# EAGLE board zero_board (EAGLE 9.5.2)
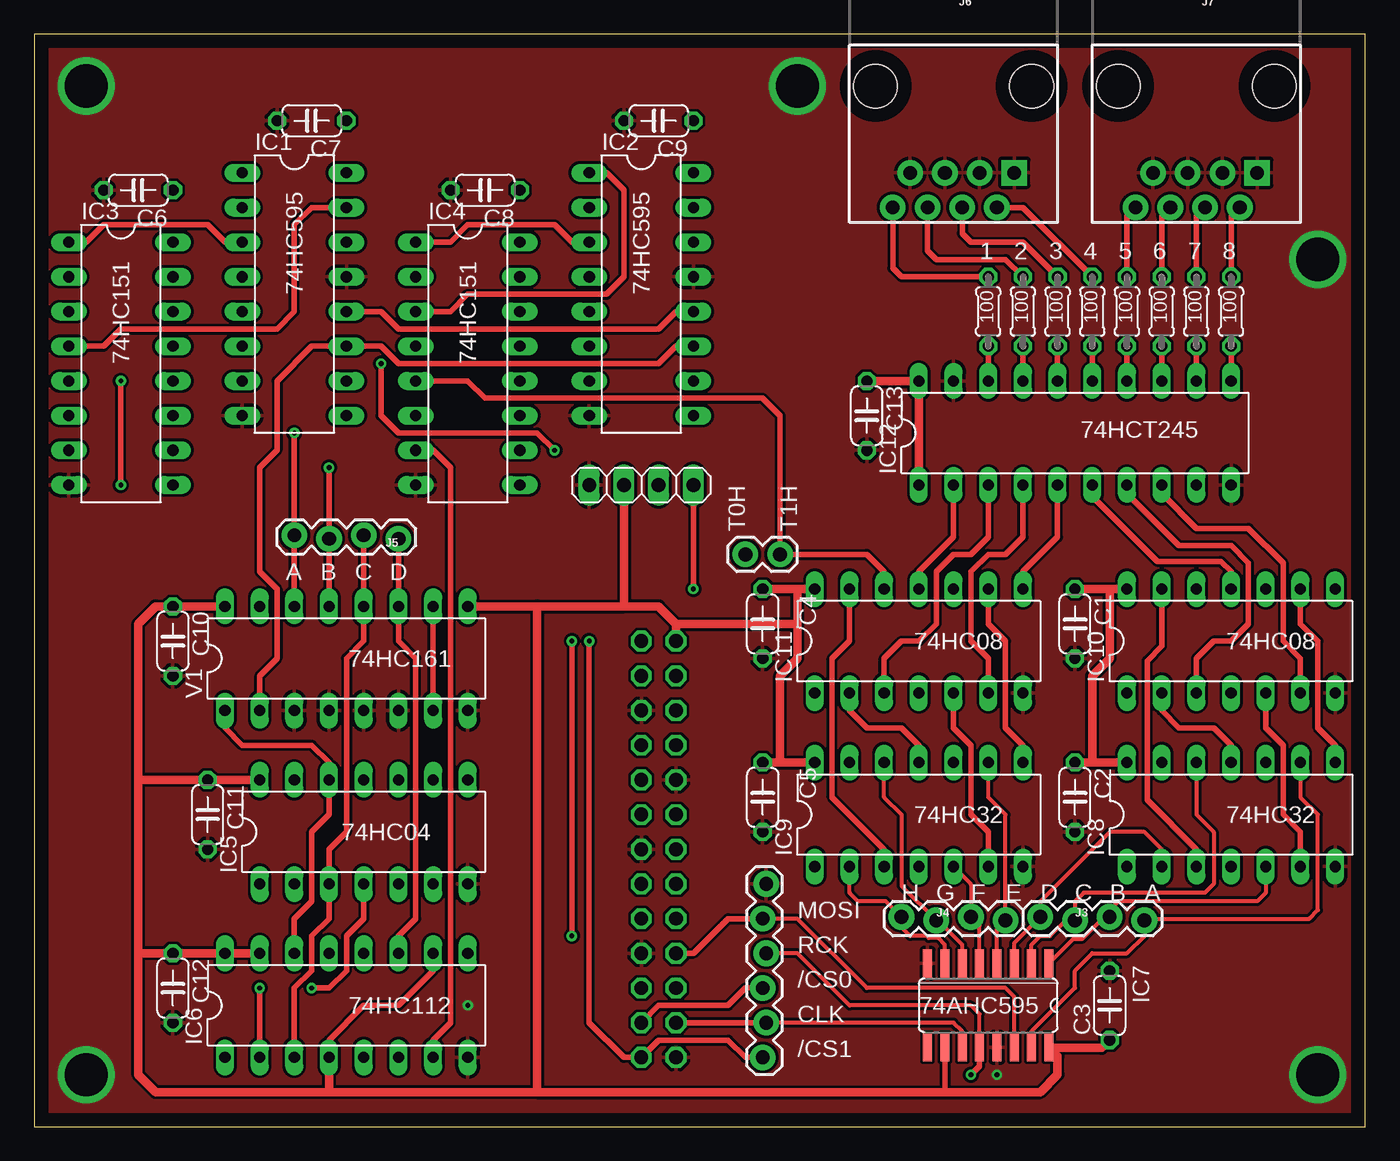
[diagram p0: board, top side]
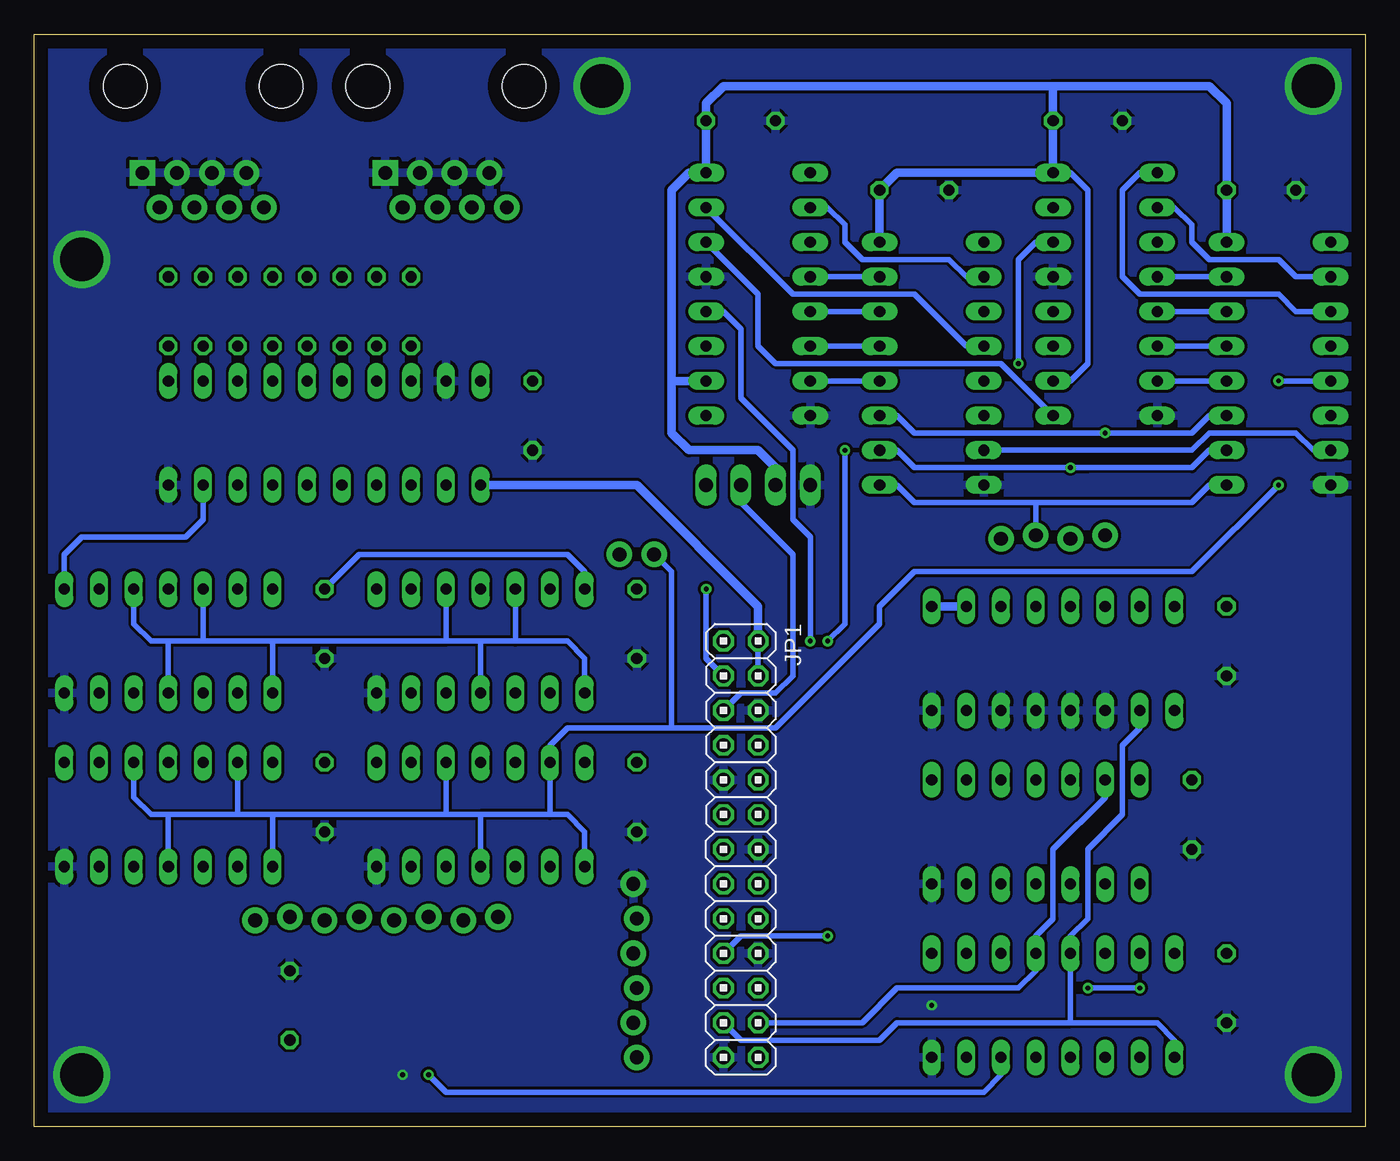
[diagram p1: board, bottom side, seen from below]

Size 97.46 x 80 mm. Coordinates in mm from the lower left corner, seen from the top.
Outline: 0,0 97.46,0 97.46,80 0,80 0,0
Copper layers (1*16): Top 0.035mm / dielectric 1.5mm / Bottom 0.035mm
Design rules "default": minimum track width 6mil, minimum drill 0.35mm, track to track 6mil, track to pad 6mil, pad to pad 6mil, via to via 6mil, smd to smd 6mil, copper to edge 40mil, drill to drill 6mil, minimum pad ring 10mil, minimum via ring 8mil, stop-mask expansion 4mil, vias tented up to drill 0mil, thermal gap 10mil
Net classes: 0 default: clearance 0.205 mm

## Footprints (pad centres in the part's own frame; a part is rotated, then mirrored left to right if it is on the bottom)
C050-024X044 = drill 0.813 octagon: 1 -2.54,0; 2 2.54,0
DIL16 = drill 0.813 long: 1 -8.89,-3.81; 2 -6.35,-3.81; 3 -3.81,-3.81; 4 -1.27,-3.81; 5 1.27,-3.81; 6 3.81,-3.81; 7 6.35,-3.81; 8 8.89,-3.81; 9 8.89,3.81; 10 6.35,3.81; 11 3.81,3.81; 12 1.27,3.81; 13 -1.27,3.81; 14 -3.81,3.81; 15 -6.35,3.81; 16 -8.89,3.81
DIL14 = drill 0.813 long: 1 -7.62,-3.81; 2 -5.08,-3.81; 3 -2.54,-3.81; 4 0,-3.81; 5 2.54,-3.81; 6 5.08,-3.81; 7 7.62,-3.81; 8 7.62,3.81; 9 5.08,3.81; 10 2.54,3.81; 11 0,3.81; 12 -2.54,3.81; 13 -5.08,3.81; 14 -7.62,3.81
SO16 = smd 0.66 x 2.032: 1 -4.445,-3.073; 2 -3.175,-3.073; 3 -1.905,-3.073; 4 -0.635,-3.073; 5 0.635,-3.073; 6 1.905,-3.073; 7 3.175,-3.073; 8 4.445,-3.073; 9 4.445,3.073; 10 3.175,3.073; 11 1.905,3.073; 12 0.635,3.073; 13 -0.635,3.073; 14 -1.905,3.073; 15 -3.175,3.073; 16 -4.445,3.073
DIL20 = drill 0.813 long: 1 -11.43,-3.81; 2 -8.89,-3.81; 3 -6.35,-3.81; 4 -3.81,-3.81; 5 -1.27,-3.81; 6 1.27,-3.81; 7 3.81,-3.81; 8 6.35,-3.81; 9 8.89,-3.81; 10 11.43,-3.81; 11 11.43,3.81; 12 8.89,3.81; 13 6.35,3.81; 14 3.81,3.81; 15 1.27,3.81; 16 -1.27,3.81; 17 -3.81,3.81; 18 -6.35,3.81; 19 -8.89,3.81; 20 -11.43,3.81
1X02 = drill 1.016 pad 1.88: 1 0,0; 2 2.54,0
1X06_LOCK = drill 1.016 pad 1.88: 1 0,0; 2 2.54,-0.254; 3 5.08,0; 4 7.62,-0.254; 5 10.16,0; 6 12.7,-0.254
1X04_LOCK = drill 1.016 pad 1.88: 1 0,0.127; 2 2.54,-0.127; 3 5.08,0.127; 4 7.62,-0.127
RJ45-8 = drill 1 pad 1.88 square: 1 -4.445,6.35 | drill 1 pad 1.88: 2 -3.175,8.89; 3 -1.905,6.35; 4 -0.635,8.89; 5 0.635,6.35; 6 1.905,8.89; 7 3.175,6.35; 8 4.445,8.89 | hole 3.2: -5.715,0; 5.715,0
2X13 = drill 1.016 octagon: 1 -15.24,-1.27; 2 -15.24,1.27; 3 -12.7,-1.27; 4 -12.7,1.27; 5 -10.16,-1.27; 6 -10.16,1.27; 7 -7.62,-1.27; 8 -7.62,1.27; 9 -5.08,-1.27; 10 -5.08,1.27; 11 -2.54,-1.27; 12 -2.54,1.27; 13 0,-1.27; 14 0,1.27; 15 2.54,-1.27; 16 2.54,1.27; 17 5.08,-1.27; 18 5.08,1.27; 19 7.62,-1.27; 20 7.62,1.27; 21 10.16,-1.27; 22 10.16,1.27; 23 12.7,-1.27; 24 12.7,1.27; 25 15.24,-1.27; 26 15.24,1.27
1X04 = drill 1.016 long: 1 -3.81,0; 2 -1.27,0; 3 1.27,0; 4 3.81,0
0204/5 = drill 0.813 octagon: 1 -2.54,0; 2 2.54,0

## Placement (x,y rotation side)
C1  100n  [C050-024X044]  76.2,36.83 270 top
C2  100n  [C050-024X044]  76.2,24.13 270 top
C3  100n  [C050-024X044]  78.74,8.89 90 top
C4  100n  [C050-024X044]  53.34,36.83 270 top
C5  100n  [C050-024X044]  53.34,24.13 270 top
C6  100n  [C050-024X044]  7.62,68.58 180 top
C7  100n  [C050-024X044]  20.32,73.66 180 top
C8  100n  [C050-024X044]  33.02,68.58 180 top
C9  100n  [C050-024X044]  45.72,73.66 180 top
C10  100n  [C050-024X044]  10.16,35.56 270 top
C11  100n  [C050-024X044]  12.7,22.86 270 top
C12  100n  [C050-024X044]  10.16,10.16 270 top
C13  100n  [C050-024X044]  60.96,52.07 270 top
IC1  74HC595  [DIL16]  19.05,60.96 270 top
IC2  74HC595  [DIL16]  44.45,60.96 270 top
IC3  74HC151  [DIL16]  6.35,55.88 270 top
IC4  74HC151  [DIL16]  31.75,55.88 270 top
IC5  74HC04  [DIL14]  24.13,21.59 0 top
IC6  74HC112  [DIL16]  22.86,8.89 0 top
IC7  74AHC595  [SO16]  69.85,8.89 180 top
IC8  74HC32  [DIL14]  87.63,22.86 0 top
IC9  74HC32  [DIL14]  64.77,22.86 0 top
IC10  74HC08  [DIL14]  87.63,35.56 0 top
IC11  74HC08  [DIL14]  64.77,35.56 0 top
IC12  74HCT245  [DIL20]  76.2,50.8 0 top
J1  DEBUG_TxH  [1X02]  54.61,41.91 180 top
J2  DEBUG_SPI  [1X06_LOCK]  53.34,5.08 90 top
J3  DEBUG_QA-QD  [1X04_LOCK]  73.66,15.24 0 top
J4  DEBUG_QE-QH  [1X04_LOCK]  63.5,15.24 0 top
J5  DEBUG_ABCD  [1X04_LOCK]  26.67,43.18 180 top
J6  RJ45  [RJ45-8]  67.31,76.2 180 top
J7  RJ45  [RJ45-8]  85.09,76.2 180 top
JP1  OPi Zero  [2X13]  45.72,20.32 270 bottom
JP2  I2C  [1X04]  44.45,46.99 0 top
R1  100  [0204/5]  69.85,59.69 90 top
R2  100  [0204/5]  72.39,59.69 90 top
R3  100  [0204/5]  74.93,59.69 90 top
R4  100  [0204/5]  77.47,59.69 90 top
R5  100  [0204/5]  80.01,59.69 90 top
R6  100  [0204/5]  82.55,59.69 90 top
R7  100  [0204/5]  85.09,59.69 90 top
R8  100  [0204/5]  87.63,59.69 90 top
V1  74HC161  [DIL16]  22.86,34.29 0 top

## Library data of the parts
C1-C13 = rcl; SPICEPREFIX: C
IC1-IC7 IC10-IC12 = 74xx-eu
IC8 IC9 = 74xx-us
J1 J2 = SparkFun-Connectors
J3-J5 = SparkFun-Connectors; PROD_ID: CONN-09696
J6 J7 = SparkFun-Connectors; PROD_ID: CONN-08506; SF_ID: PRT-00643
JP1 JP2 = pinhead
R1-R8 = rcl
V1 = 74ttl-din

## Nets
5V: C13.1 IC12.1 IC12.20 JP1.2 JP1.4
/G_151: IC3.7 IC4.7 IC6.7
/SPI_CS0: IC5.13 IC6.12 J2.3 JP1.24
/SPI_CS1: IC1.12 IC2.12 J2.1 JP1.26
A: IC3.11 IC4.11 J5.4 V1.14
A1: IC11.11 IC12.2
A2: IC11.3 IC12.3
A3: IC11.6 IC12.4
A4: IC11.8 IC12.5
A5: IC10.11 IC12.6
A6: IC10.3 IC12.7
A7: IC10.6 IC12.8
A8: IC10.8 IC12.9
B: IC3.10 IC4.10 J5.3 V1.13
C: IC3.9 IC4.9 IC5.3 IC6.3 J5.2 V1.12
D: IC6.11 J5.1 V1.11
GND: C1.2 C2.2 C3.2 C4.2 C5.2 C6.2 C7.2 C8.2 C9.2 C10.2 C11.2 C12.2 C13.2 IC1.8 IC1.13 IC2.8 IC2.13 IC3.8 IC4.8 IC5.7 IC6.8 IC7.8 IC7.13 IC8.7 IC9.7 IC10.7 IC11.7 IC12.10 IC12.19 J2.6 J6.1 J6.3 J6.5 J6.7 J7.1 J7.3 J7.5 J7.7 JP1.6 JP1.9 JP1.14 JP1.20 JP1.25 JP2.1 V1.3 V1.4 V1.5 V1.6 V1.8
N$1: IC9.8 IC11.9
N$2: IC9.6 IC11.5
N$3: IC9.11 IC11.2
N$4: IC9.3 IC11.13
N$5: IC8.8 IC10.9
N$6: IC8.6 IC10.5
N$7: IC8.11 IC10.2
N$11: IC1.15 IC3.4
N$12: IC1.1 IC3.3
N$13: IC1.2 IC3.2
N$14: IC1.3 IC3.1
N$15: IC5.4 IC6.2
N$16: IC8.3 IC10.13
N$19: IC2.15 IC4.4
N$21: IC1.4 IC3.15
N$22: IC1.5 IC3.14
N$23: IC1.6 IC3.13
N$24: IC1.7 IC3.12
N$25: IC2.1 IC4.3
N$27: IC2.2 IC4.2
N$28: IC2.3 IC4.1
N$29: IC2.4 IC4.15
N$30: IC2.5 IC4.14
N$31: IC2.6 IC4.13
N$32: IC2.7 IC4.12
N$35: IC12.18 R1.1
N$37: IC12.17 R2.1
N$38: IC12.16 R3.1
N$39: IC12.15 R4.1
N$40: IC12.14 R5.1
N$41: IC12.13 R6.1
N$42: IC12.12 R7.1
N$43: IC12.11 R8.1
N$44: IC1.9 IC2.14
O1: J6.8 R1.2
O2: J6.6 R2.2
O3: J6.4 R3.2
O4: J6.2 R4.2
O5: J7.8 R5.2
O6: J7.6 R6.2
O7: J7.4 R7.2
O8: J7.2 R8.2
QA: IC7.15 IC8.9 J3.4
QB: IC7.1 IC8.5 J3.3
QC: IC7.2 IC8.12 J3.2
QD: IC7.3 IC8.2 J3.1
QE: IC7.4 IC9.9 J4.4
QF: IC7.5 IC9.5 J4.3
QG: IC7.6 IC9.12 J4.2
QH: IC7.7 IC9.2 J4.1
RCK: IC6.6 IC7.12 J2.4
SCL: JP1.5 JP2.3
SDA: JP1.3 JP2.4
SPI_CLK: IC1.11 IC2.11 IC6.1 IC6.13 IC7.11 J2.2 JP1.23 V1.2
SPI_CS0: IC5.12 IC6.14 V1.1
SPI_MOSI: IC1.14 IC7.14 J2.5 JP1.19
T0H: IC3.5 IC8.1 IC8.4 IC8.10 IC8.13 IC9.1 IC9.4 IC9.10 IC9.13 J1.2
T1H: IC4.5 IC10.1 IC10.4 IC10.10 IC10.12 IC11.1 IC11.4 IC11.10 IC11.12 J1.1
VCC: C1.1 C2.1 C3.1 C4.1 C5.1 C6.1 C7.1 C8.1 C9.1 C10.1 C11.1 C12.1 IC1.10 IC1.16 IC2.10 IC2.16 IC3.16 IC4.16 IC5.14 IC6.4 IC6.10 IC6.15 IC6.16 IC7.10 IC7.16 IC8.14 IC9.14 IC10.14 IC11.14 JP1.1 JP2.2 V1.7 V1.9 V1.10 V1.16

## Tracks (layer width: path | path; a pad name or v marks a point on that pad's centre or on a via)
5V
  Top 0.61: IC12.1 IC12.20 C13.1
  Bottom 0.406: JP1.4 JP1.2
  Bottom 0.61: IC12.1 53.34,46.99 44.45,38.1 JP1.2
/G_151
  Top 0.406: IC6.7 29.21,6.35 30.48,7.62 30.48,48.26 29.21,49.53 IC4.7
  Bottom 0.406: IC3.7 3.81,49.53 5.08,50.8 11.43,50.8 12.7,49.53 IC4.7
/SPI_CS0
  Top 0.406: JP1.24 45.72,8.89 50.8,8.89 52.07,10.16 J2.3
  Bottom 0.406: JP1.24 36.83,7.62 34.29,10.16 25.4,10.16 24.13,11.43 IC6.12 24.13,13.97 22.86,15.24 22.86,20.32 19.05,24.13 IC5.13
/SPI_CS1  (via drill 0.35)
  Top 0.406: IC1.12 25.4,59.69 26.67,58.42 45.72,58.42 46.99,59.69 IC2.12 | v40.64,35.56 40.64,7.62 43.18,5.08 JP1.26 45.72,6.35 50.8,6.35 52.07,5.08 J2.1
  Bottom 0.406: IC2.12 46.99,59.69 45.72,58.42 45.72,53.34 41.91,49.53 41.91,44.45 40.64,43.18 v40.64,35.56
A  (via drill 0.35)
  Top 0.406: V1.14 J5.4 v19.05,50.8
  Bottom 0.406: IC3.11 11.43,52.07 12.7,50.8 v19.05,50.8 20.32,50.8 33.02,50.8 34.29,52.07 IC4.11
A1
  Top 0.406: IC11.11 64.77,40.64 67.31,43.18 IC12.2
A2
  Top 0.406: IC11.3 62.23,34.29 63.5,35.56 64.77,35.56 66.04,36.83 66.04,40.64 67.31,41.91 68.58,41.91 69.85,43.18 IC12.3
A3
  Top 0.406: IC11.6 69.85,34.29 68.58,35.56 68.58,40.64 69.85,41.91 71.12,41.91 72.39,43.18 IC12.4
A4
  Top 0.406: IC11.8 72.39,40.64 74.93,43.18 IC12.5
A5
  Top 0.406: IC10.11 87.63,40.64 86.87,41.4 82.23,41.4 77.47,46.16 IC12.6
A6
  Top 0.406: IC12.7 80.01,46.35 83.82,42.55 87.63,42.55 88.9,41.27 88.9,36.83 87.63,35.56 86.36,35.56 85.09,34.29 IC10.3
A7
  Top 0.406: IC12.8 82.55,46.35 85.09,43.81 88.9,43.81 91.44,41.27 91.44,35.56 92.71,34.29 IC10.6
A8
  Bottom 0.406: IC10.8 95.25,41.91 93.98,43.18 86.36,43.18 85.09,44.45 IC12.9
B  (via drill 0.35)
  Top 0.406: V1.13 J5.3 v21.59,48.26
  Bottom 0.406: IC3.10 11.43,49.53 12.7,48.26 20.32,48.26 v21.59,48.26 33.02,48.26 34.29,49.53 IC4.10
C
  Top 0.406: J5.2 V1.12 24.13,35.56 22.86,34.29 22.86,21.59 21.59,20.32 IC5.3 21.59,15.24 20.32,13.97 20.32,11.43 19.05,10.16 IC6.3
  Bottom 0.406: IC3.9 11.43,46.99 12.7,45.72 24.13,45.72 | 24.13,45.72 33.02,45.72 34.29,46.99 IC4.9 | J5.2 24.13,45.72
D
  Top 0.406: J5.1 V1.11 26.67,35.56 27.94,34.29 27.94,15.24 26.67,13.97 IC6.11
GND  (via drill 0.35, 3.17)
  other vias: 3.81,76.2 3.81,3.81 93.98,3.81 93.98,63.5 55.88,76.2 31.75,8.89 70.48,3.81
  pour Top: 0,0 97.79,0 97.79,80.01 0,80.01
  pour Bottom: 0,0 97.79,0 97.79,80.01 0,80.01
N$1
  Top 0.406: IC9.8 72.39,27.94 71.12,29.21 71.12,35.56 69.85,36.83 IC11.9
N$2
  Top 0.406: IC9.6 69.85,21.59 68.58,22.86 68.58,27.94 67.31,29.21 IC11.5
N$3
  Top 0.406: IC9.11 64.77,27.94 63.5,29.21 60.96,29.21 59.69,30.48 IC11.2
N$4
  Top 0.406: IC9.3 62.23,20.32 58.42,24.13 58.42,34.29 59.69,35.56 IC11.13
N$5
  Top 0.406: IC8.8 95.25,27.94 93.98,29.21 93.98,35.56 92.71,36.83 IC10.9
N$6
  Top 0.406: IC8.6 92.71,21.59 91.44,22.86 91.44,27.94 90.17,29.21 IC10.5
N$7
  Top 0.406: IC8.11 87.63,27.94 86.36,29.21 83.82,29.21 82.55,30.48 IC10.2
N$11
  Top 0.406: IC1.15 20.32,67.31 19.05,66.04 19.05,59.69 17.78,58.42 6.35,58.42 5.08,57.15 IC3.4
N$12
  Bottom 0.406: IC3.3 5.08,59.69 6.35,60.96 16.51,60.96 17.78,62.23 17.78,68.58 16.51,69.85 IC1.1
N$13
  Bottom 0.406: IC3.2 5.08,62.23 6.35,63.5 11.43,63.5 12.7,64.77 12.7,66.04 13.97,67.31 IC1.2
N$14
  Top 0.406: IC3.1 3.81,64.77 5.08,66.04 12.7,66.04 13.97,64.77 IC1.3
N$15  (via drill 0.35)
  Top 0.406: IC5.4 24.13,15.24 22.86,13.97 22.86,11.43 21.59,10.16 v20.32,10.16 | v16.51,10.16 IC6.2
  Bottom 0.406: v20.32,10.16 v16.51,10.16
N$16
  Top 0.406: IC8.3 85.09,20.32 81.48,23.93 81.48,34.12 82.55,35.19 IC10.13
N$19
  Bottom 0.406: IC2.15 41.91,60.96 33.02,60.96 29.21,57.15 IC4.4
N$21
  Bottom 0.406: IC3.15 IC1.4
N$22
  Bottom 0.406: IC3.14 IC1.5
N$23
  Bottom 0.406: IC3.13 IC1.6
N$24
  Bottom 0.406: IC3.12 IC1.7
N$25
  Top 0.406: IC4.3 30.48,59.69 31.75,60.96 41.91,60.96 43.18,62.23 43.18,68.58 41.91,69.85 IC2.1
N$27
  Bottom 0.406: IC2.2 39.37,67.31 38.1,66.04 38.1,64.77 36.83,63.5 30.48,63.5 29.21,62.23 IC4.2
N$28
  Top 0.406: IC4.1 30.48,64.77 31.75,66.04 38.1,66.04 39.37,64.77 IC2.3
N$29
  Bottom 0.406: IC4.15 IC2.4
N$30
  Bottom 0.406: IC4.14 IC2.5
N$31
  Bottom 0.406: IC2.6 IC4.13
N$32
  Bottom 0.406: IC4.12 IC2.7
N$35
  Top 0.406: R1.1 IC12.18
N$37
  Top 0.406: IC12.17 R2.1
N$38
  Top 0.406: R3.1 IC12.16
N$39
  Top 0.406: IC12.15 R4.1
N$40
  Top 0.406: R5.1 IC12.14
N$41
  Top 0.406: IC12.13 R6.1
N$42
  Top 0.406: IC12.12 R7.1
N$43
  Top 0.406: IC12.11 R8.1
N$44
  Bottom 0.406: IC2.14 44.45,60.96 44.45,57.15 43.18,55.88 26.67,55.88 IC1.9
O1
  Top 0.406: J6.8 62.87,62.87 63.5,62.23 R1.2
O2
  Top 0.406: R2.2 71.12,63.5 66.04,63.5 65.4,64.14 J6.6
O3
  Top 0.406: R3.2 72.39,64.77 68.58,64.77 67.94,65.41 J6.4
O4
  Top 0.406: J6.2 72.39,67.31 R4.2
O5
  Top 0.406: J7.8 80.01,66.67 R5.2
O6
  Top 0.406: J7.6 82.55,66.67 R6.2
O7
  Top 0.406: J7.4 85.09,66.67 R7.2
O8
  Top 0.406: J7.2 87.63,66.67 R8.2
QA
  Top 0.305: IC7.15 73.02,6.99 76.2,10.16 76.2,11.43 77.47,12.7 80.01,12.7 81.34,14.03 81.34,15.18 | IC8.9 92.71,24.13 93.98,22.86 93.98,15.88 93.34,15.24 81.41,15.24 81.34,15.18 | J3.4 81.34,15.18
QB
  Top 0.305: IC7.1 76.1,13.77 76.76,13.77 78.36,15.37 J3.3 78.74,15.88 79.38,16.51 89.53,16.51 90.17,17.14 IC8.5
QC
  Top 0.305: IC8.12 85.09,22.86 86.36,21.59 86.36,17.78 85.72,17.14 76.83,17.14 76.2,16.51 J3.2 75.52,15.11 74.38,13.97 73.66,13.97 73.02,13.34 IC7.2
QD
  Top 0.305: IC7.3 71.75,13.46 J3.1 73.66,16.51 78.74,21.59 81.28,21.59 82.55,20.32 IC8.2
QE
  Top 0.305: IC9.9 69.85,24.13 71.12,22.86 J4.4 70.48,14.48 IC7.4
QF
  Top 0.305: IC7.5 69.21,14.73 J4.3 68.58,17.78 IC9.5
QG
  Top 0.305: IC9.12 62.23,24.13 63.5,22.86 63.5,17.65 J4.2 66.17,15.11 67.94,13.34 IC7.6
QH
  Top 0.305: IC7.7 66.67,13.34 66.19,13.82 65.5,13.82 65.35,13.97 64.13,13.97 63.5,14.61 J4.1 62.36,16.51 60.33,16.51 59.69,17.14 IC9.2
RCK  (via drill 0.35)
  Top 0.305: IC7.12 69.21,8.26 68.58,8.89 59.69,8.89 55.88,12.7 J2.4
  Top 0.406: v68.58,3.81 69.21,4.45 IC7.12
  Bottom 0.406: v68.58,3.81 67.31,2.54 27.94,2.54 26.67,3.81 IC6.6
SCL
  Bottom 0.406: JP2.3 45.72,45.72 41.91,41.91 41.91,33.02 43.18,31.75 45.72,31.75 JP1.5
SDA  (via drill 0.35)
  Top 0.406: JP2.4 v48.26,39.37
  Bottom 0.406: JP1.3 48.26,34.29 v48.26,39.37
SPI_CLK
  Top 0.305: IC7.11 67.94,6.99 67.31,7.62 J2.2
  Top 0.406: IC2.11 46.99,57.15 45.72,55.88 26.67,55.88 25.4,57.15 IC1.11 20.32,57.15 17.78,54.61 17.78,49.53 16.51,48.26 16.51,40.64 17.78,39.37 17.78,34.29 16.51,33.02 V1.2 | J2.2 JP1.23
  Bottom 0.406: IC6.1 13.97,6.35 15.24,7.62 21.59,7.62 | JP1.23 45.72,6.35 35.56,6.35 34.29,7.62 21.59,7.62 | 21.59,7.62 IC6.13 21.59,13.97 20.32,15.24 20.32,20.32 17.78,22.86 17.78,27.94 16.51,29.21 V1.2
SPI_CS0
  Top 0.406: IC6.14 19.05,15.24 20.32,16.51 20.32,21.59 21.59,22.86 IC5.12 21.59,26.67 20.32,27.94 15.24,27.94 13.97,29.21 V1.1
SPI_MOSI  (via drill 0.35)
  Top 0.305: IC7.14 71.75,9.53 71.12,10.16 60.96,10.16 55.88,15.24 J2.5
  Top 0.406: JP1.19 48.26,12.7 50.8,15.24 J2.5 | v39.37,35.56 v39.37,13.97 | v25.4,55.88 25.4,52.07 26.67,50.8 36.83,50.8 v38.1,49.53
  Bottom 0.406: JP1.19 45.72,13.97 v39.37,13.97 | v25.4,55.88 25.4,63.5 24.13,64.77 IC1.14 | v39.37,35.56 38.1,36.83 v38.1,49.53
T0H  (via drill 0.35)
  Top 0.406: v6.35,46.99 v6.35,54.61
  Bottom 0.406: 64.77,22.86 IC9.4 | IC9.1 57.15,21.59 58.42,22.86 59.69,22.86 | 59.69,22.86 64.77,22.86 | 59.69,22.86 IC9.13 59.69,27.94 58.42,29.21 50.8,29.21 | 67.31,22.86 64.77,22.86 | IC9.10 67.31,22.86 | 50.8,29.21 43.18,29.21 35.56,36.83 35.56,38.1 33.02,40.64 12.7,40.64 v6.35,46.99 | J1.2 50.8,40.64 50.8,29.21 | IC8.10 90.17,24.13 88.9,22.86 87.63,22.86 | 87.63,22.86 82.55,22.86 | 82.55,22.86 80.01,22.86 | 80.01,22.86 67.31,22.86 | IC8.13 82.55,22.86 | IC8.4 87.63,22.86 | IC8.1 80.01,22.86 | v6.35,54.61 IC3.5
T1H
  Top 0.406: IC4.5 31.75,54.61 33.02,53.34 53.34,53.34 54.61,52.07 J1.1 60.96,41.91 62.23,40.64 IC11.12
  Bottom 0.406: IC11.1 57.15,34.29 58.42,35.56 62.23,35.56 | 62.23,35.56 64.77,35.56 | 64.77,35.56 IC11.4 | IC11.10 67.31,35.56 | IC11.12 62.23,35.56 | 64.77,35.56 67.31,35.56 | IC10.10 90.17,36.83 88.9,35.56 87.63,35.56 | 87.63,35.56 85.09,35.56 | 85.09,35.56 80.01,35.56 | 80.01,35.56 67.31,35.56 | IC10.12 85.09,35.56 | IC10.4 87.63,35.56 | IC10.1 80.01,35.56
VCC
  Top 0.406: IC7.10 66.67,2.54 | V1.7 V1.10 | IC6.4 21.59,6.35 24.13,8.89 26.67,8.89 29.21,11.43 IC6.10
  Top 0.61: V1.9 36.83,38.1 | 36.83,38.1 36.83,2.54 | 36.83,2.54 21.59,2.54 | 21.59,2.54 IC6.4 | C2.1 77.47,26.67 | 77.47,26.67 IC8.14 | 77.47,26.67 77.47,33.02 78.74,34.29 78.74,39.37 | C4.1 55.88,39.37 | 55.88,39.37 IC11.14 | C1.1 78.74,39.37 | 78.74,39.37 IC10.14 | V1.16 C10.1 8.89,38.1 7.62,36.83 7.62,25.4 | C5.1 54.61,26.67 | 54.61,26.67 IC9.14 | 7.62,12.7 C12.1 IC6.16 IC6.15 | 7.62,12.7 7.62,25.4 | 7.62,25.4 C11.1 IC5.14 | 21.59,2.54 8.89,2.54 7.62,3.81 7.62,12.7 | 36.83,2.54 66.67,2.54 73.66,2.54 74.93,3.81 74.93,5.18 74.35,5.77 | 74.35,5.77 IC7.16 | C3.1 78.16,5.77 74.35,5.77 | 36.83,38.1 43.18,38.1 | JP2.2 43.18,38.1 | JP1.1 46.99,36.83 | 46.99,36.83 45.72,38.1 43.18,38.1 | 54.61,26.67 54.61,33.02 55.88,34.29 55.88,36.83 | 55.88,36.83 55.88,39.37 | 46.99,36.83 55.88,36.83
  Bottom 0.406: C1.1 73.66,41.91 58.42,41.91 57.15,40.64 IC11.14 | IC1.10 21.59,54.61 20.32,55.88 20.32,68.58 21.59,69.85 IC1.16
  Bottom 0.61: V1.10 V1.9 | IC3.16 C6.1 10.16,74.93 11.43,76.2 22.86,76.2 | IC4.16 C8.1 34.29,69.85 IC1.16 C7.1 22.86,76.2 | 22.86,76.2 46.99,76.2 48.26,74.93 C9.1 IC2.16 49.53,69.85 50.8,68.58 50.8,54.61 | JP2.2 43.18,48.26 44.45,49.53 49.53,49.53 50.8,50.8 50.8,54.61 | IC2.10 50.8,54.61

## Text on the board
tPlace: 1 | 2 | 3 | 4 | 5 | 6 | 7 | 8 | T0H | T1H | A | B | C | D | H | G | F | E | D | C | B | A | MOSI | RCK | /CS0 | CLK | /CS1